# Altium PCB NL_CTL2.0.PcbDoc
Units mil, origin at the board's own origin, x right, y up, seen from the top; angles counter-clockwise.
Board outline 2839.68 x 2573.63 mil, 2 copper layers (Top Layer, Bottom Layer); 37 components, 40 nets, 140 pads, 131 vias.
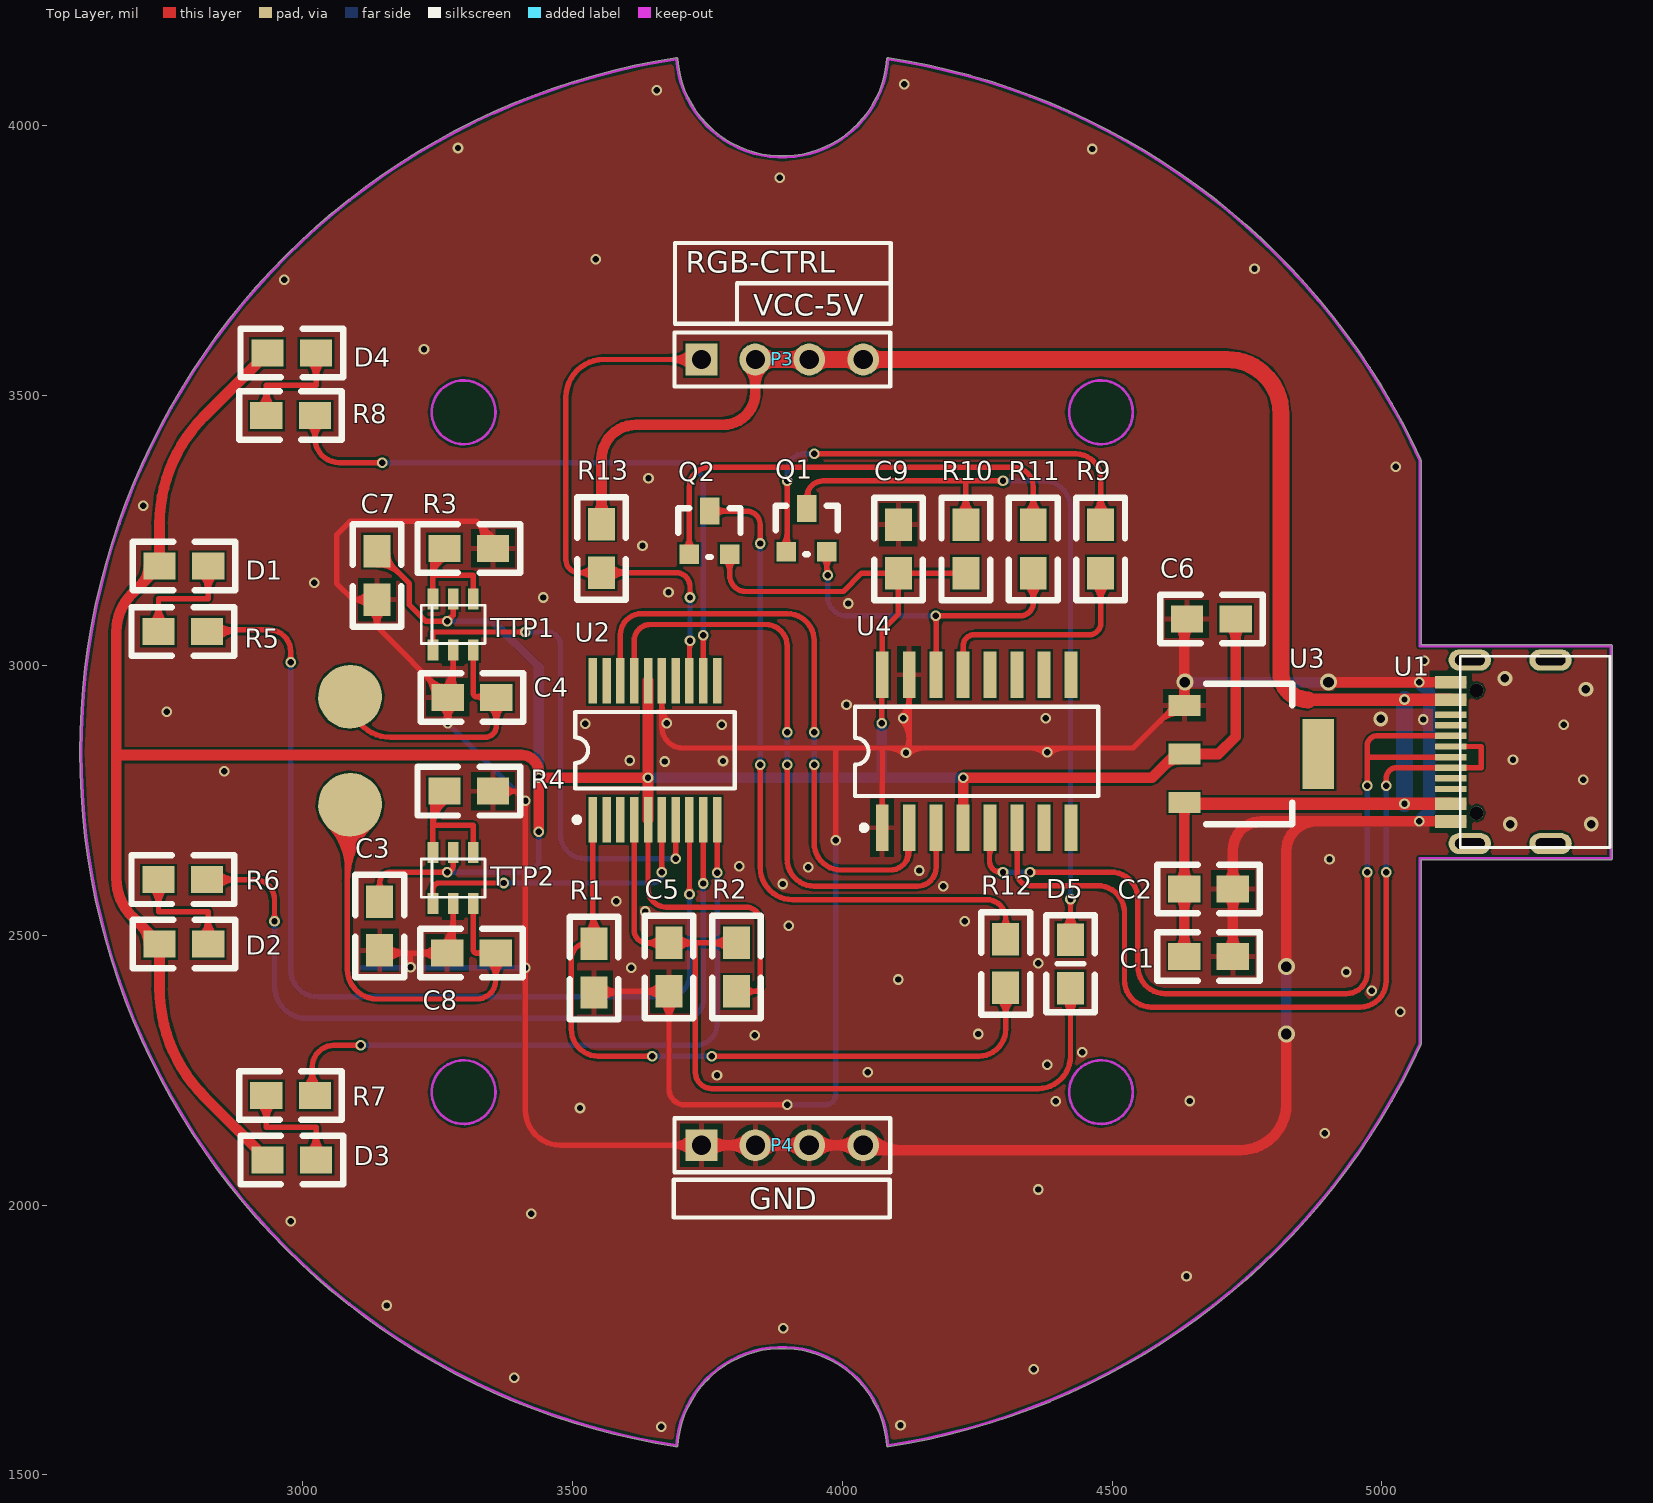
[diagram p0: Top Layer view]
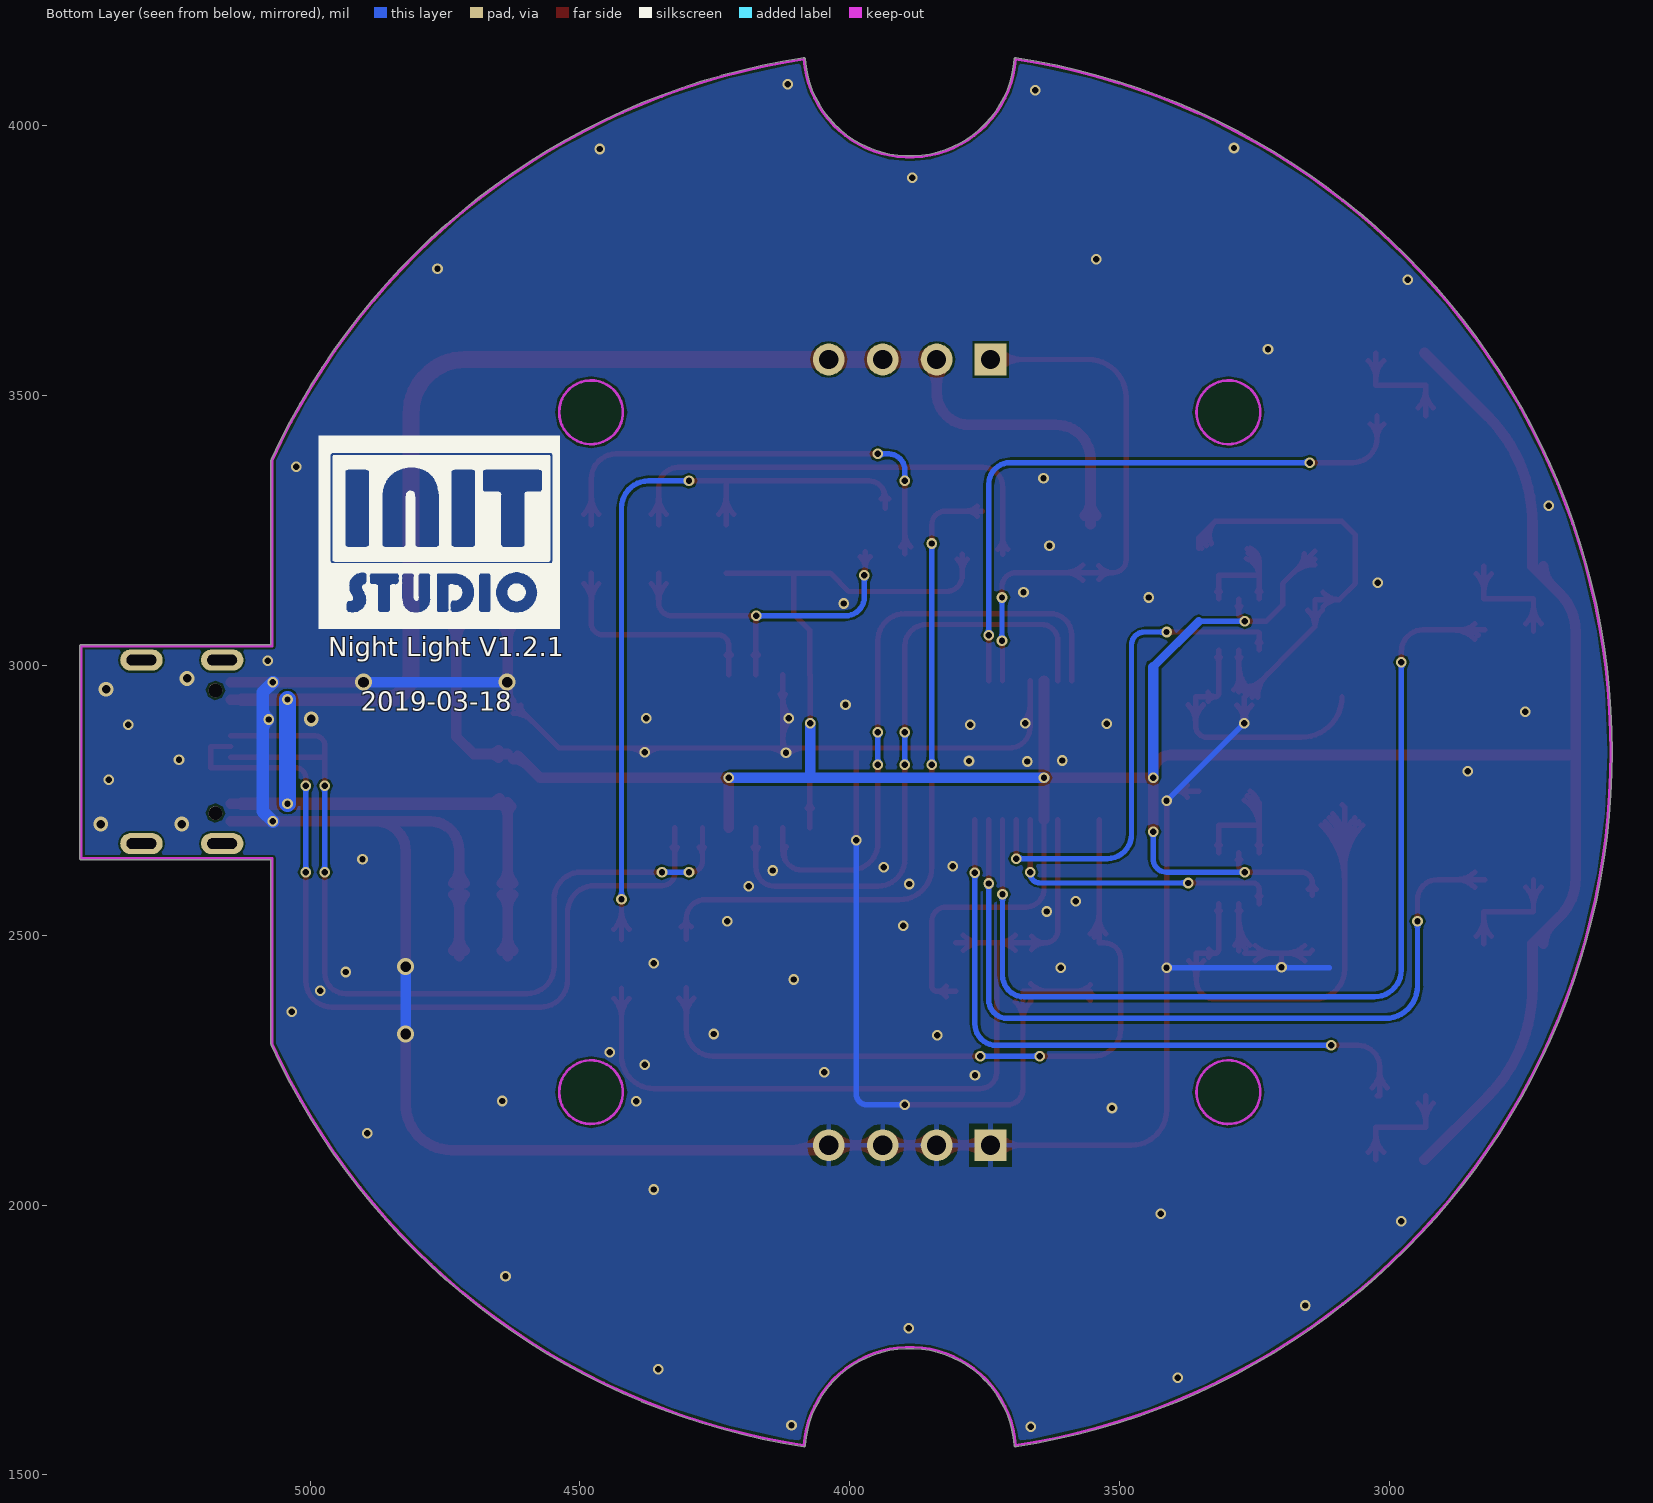
[diagram p1: Bottom Layer view, seen from below]

## Layer stack, top to bottom
Top Solder: solder mask 0.4, Solder Resist, Dk 3.5
Top Layer: signal copper 1.4
Dielectric1: dielectric 12.6, FR-4, Dk 4.8
Bottom Layer: signal copper 1.4
Bottom Solder: solder mask 0.4, Solder Resist, Dk 3.5

## Board outline
3695.13,1554.78 cw(c3888.91,1540.06) 3695.13,1554.8 cw(c3888.91,1540.06) 4082.68,1554.8 cw(c3888.91,1540.06) 4082.68,1554.78 4082.68,1554.8 ccw(c4085.19,1554.97) 4085.57,1552.48 ccw(c3888.91,2839.27) 5072.29,2296.97 ccw(c5070.01,2298.02) 5072.52,2298.02 5072.52,2639.91 5424.34,2639.91 ccw(c5424.34,2642.42) 5426.85,2642.42 ccw(c5424.34,2642.42) 5426.52,2643.68 5426.52,3034.86 ccw(c5424.34,3036.12) 5426.85,3036.12 ccw(c5424.34,3036.12) 5424.34,3038.64 5072.52,3038.64 5072.52,3380.52 ccw(c5070.01,3380.52) 5072.29,3381.57 ccw(c3888.91,2839.27) 4085.57,4126.06 ccw(c4085.19,4123.57) 4082.68,4123.74 ccw(c3888.91,4138.48) 4082.68,4123.76 4082.68,4123.74 cw(c3888.91,4138.48) 3695.13,4123.74 cw(c3888.91,4138.48) 3695.13,4123.76 3695.13,4123.74 ccw(c3692.62,4123.57) 3692.24,4126.06 ccw(c3888.91,2839.27) 3692.24,1552.48 ccw(c3692.62,1554.97)

## Design rules (kind name [scope] priority, off if disabled: settings)
Clearance [All] p1: gap=3.94
PolygonConnect PolygonConnect_1 [IsVia] p1: connectstyle=Direct reliefconductorwidth=10 reliefentries=4 polygonreliefangle="90 Angle" airgapwidth=10
PolygonConnect [All] p2: connectstyle=Relief reliefconductorwidth=10 reliefentries=4 polygonreliefangle="90 Angle" airgapwidth=10
RoutingVias [All] p1: holewidth=11.81 width=19.68 viastyle="Through Hole" minholewidth=11.81 minwidth=19.68 maxholewidth=11.81 maxwidth=19.68
SilkToSolderMaskClearance SilkscreenOverComponentPads [IsPad] p1: minsilkscreentomaskgap=10 clearancetoexposedcopper=TRUE
SolderMaskExpansion [All] p1: expansion=4
Width [All] p1: maxlimit=78.74 minlimit=10 preferedwidth=10
29 further rules are at their usual default settings.

## Components (designator, comment, footprint, x,y, rotation, side; value= is the part's Value field where it differs from the comment)
C1 "Cap" 0805 4724,2461 r180 top
C2 "Cap" 0805 4724,2586 r180 top
C3 "Cap" 0805 3143,2472 r90 top
C4 "Cap" 0805 3269,2941 r0 top
C5 "Cap" 0805 3679,2396 r90 top
C6 "Cap" 0805 4639,3086 r0 top
C7 "Cap" 0805 3138,3122 r90 top
C8 "Cap" 0805 3268,2467 r0 top
C9 "Cap" 0805 4104,3261 r270 top
D1 "LED0" 0805 2735,3184 r0 top
D2 "LED0" 0805 2735,2484 r0 top
D3 "LED0" 0805 2935,2084 r0 top
D4 "LED0" 0805 2935,3579 r0 top
D5 "DIODE" 0805L 4418,2402 r90 top
P3 "Header 4" HDR1X4 3739,3567 r0 top
P4 "Header 4" HDR1X4 3739,2111 r0 top
Q1 "8050" SOT23 3934,3251 r0 top
Q2 "8550" SOT23 3754,3246 r0 top
R1 "Res2" 0805 3540,2394 r90 top
R2 "Res2" 0805 3804,2486 r270 top
R3 "Res2" 0805 3353,3217 r180 top
R4 "Res2" 0805 3353,2767 r180 top
R5 "Res2" 0805 2733,3063 r0 top
R6 "Res2" 0805 2733,2603 r0 top
R7 "Res2" 0805 2933,2203 r0 top
R8 "Res2" 0805 2933,3463 r0 top
R9 "Res2" 0805 4479,3171 r90 top (schematic designator R13)
R10 "Res2" 0805 4229,3171 r90 top (schematic designator R14)
R11 "Res2" 0805 4354,3261 r270 top (schematic designator R15)
R12 "Res2" 0805 4303,2403 r90 top (schematic designator R16)
R13 "Res2" 0805 3554,3172 r90 top (schematic designator R17)
TTP1 "TTP" SOT23-6L 3279,3076 r90 top
TTP2 "TTP" SOT23-6L 3279,2606 r90 top
U1 "Type_C_16" Type_C16 5226,2840 r0 top
U2 "STM32f030F4P6" SSOP20 3644,2841 r90 top
U3 "AMS1117_3.3" SOT-223 4634,2926 r270 top
U4 "CH340C" SOP16 4249,2841 r0 top

## Footprints (in the part's own frame and the unit in brackets; to place one, negate y for a bottom-side part, rotate by r counter-clockwise, add the part's x,y. Pads: shape width x height; smd on the part's side, far side on the other; paste and mask are expansions set on the pad)
0805 [mil]
  rect 60x50 smd: 1(0,0) 2(90,0)
  silkscreen extent -50,-45 140,45
0805L [mil]
  rect 60x50 smd: 1(0,-5) 2(90,-5)
  silkscreen extent -45,-50 135,40
HDR1X4 [mm] "Connector; Header; 4 Position"
  rect 1.5x1.5 hole 0.9: 1(0,0)
  round 1.5 hole 0.9: 2(2.54,0) 3(5.08,0) 4(7.62,0)
  silkscreen extent -1.27,-1.27 8.89,1.27
SOP16 [mm] "Small Outline; 16 Leads; Body Wid"
  rect 0.6x2.2 smd: 1(-4.445,-3.6) 2(-3.175,-3.6) 3(-1.905,-3.6) 4(-0.635,-3.6) 5(0.635,-3.6) 6(1.905,-3.6) 7(3.175,-3.6) 8(4.445,-3.6) 9(4.445,3.6) 10(3.175,3.6) 11(1.905,3.6) 12(0.635,3.6) 13(-0.635,3.6) 14(-1.905,3.6) 15(-3.175,3.6) 16(-4.445,3.6)
  silkscreen extent -5.73,-3.72 5.73,2.1, body extent -5.1,-3.96 5.1,3.96, height 1.8
SOT23 [mil]
  rect 36x36 smd: B(-37.5,-40) E(37.5,-40)
  rect 36x50 smd: C(0.5,40)
  silkscreen extent -58,-45 58,45, body extent -58,-48 60,56, height 43
SOT23-6L [mm]
  rect 1x0.5 smd: 1(-1.2,0.95) 2(-1.2,0) 3(-1.2,-0.95) 4(1.2,-0.95) 5(1.2,0) 6(1.2,0.95)
  silkscreen extent -0.9,-1.5 0.9,1.5
SOT-223 [mil]
  rect 39x59 smd: 1(0,0) 3(180,0)
  rect 38.98x59.05 smd: 2(90,0)
  rect 129.13x59 smd: 4(90,248.03)
  silkscreen extent -40,40 220,200
SSOP20 [mm]
  rect 2.15x0.4 smd: 1(-3.224,2.696) 2(-3.224,2.046) 3(-3.224,1.396) 4(-3.224,0.746) 5(-3.224,0.096) 6(-3.224,-0.554) 7(-3.224,-1.204) 8(-3.224,-1.854) 9(-3.224,-2.504) 10(-3.224,-3.154) 11(3.326,-3.154) 12(3.326,-2.504) 13(3.326,-1.854) 14(3.326,-1.204) 15(3.326,-0.554) 16(3.326,0.096) 17(3.326,0.746) 18(3.326,1.396) 19(3.326,2.046) 20(3.326,2.696)
  silkscreen extent -3.35,-3.98 1.85,3.57
Type_C16 [mm]
  round 0.65 hole 0.65: 0(-1.28,2.89) 1(-1.28,-2.89)
  rect 1.5x0.6 smd: 1(-2.5,3.275) 2(-2.5,2.45) 11(-2.5,-2.45) 12(-2.5,-3.275)
  rect 1.5x0.3 smd: 3(-2.5,1.75) 4(-2.5,1.25) 5(-2.5,0.75) 6(-2.5,0.25) 7(-2.5,-0.25) 8(-2.5,-0.75) 9(-2.5,-1.25) 10(-2.5,-1.75)
  oval 2x1 hole 0.5 slot 1.4 at 0 deg: ""(-1.6,-4.32) ""(-1.6,4.32) ""(2.2,-4.32) ""(2.2,4.32)
  silkscreen extent -2.05,-4.5 5,4.5

## Part data
C1 C2 C3 C4 C5 C6 C7 C8 C9: "Capacitor"
D1 D2 D3 D4: "Typical INFRARED GaAs LED"
P3 P4: "Header, 4-Pin"
R1 R2 R3 R4 R5 R6 R7 R8 R9 R10 R11 R12 R13: "Resistor"
U1: library part T
U3: library part LM317, "3-Terminal Adjustable Positive Volta"

## Free pads (board coordinates)
  round 118.11 smd: 0(3088,2742) 1(3088,2942)

## Via types
v1: diameter 19.68, hole 11.81, Top Layer to Bottom Layer, 122 vias
v2: diameter 27.56, hole 15.75, Top Layer to Bottom Layer, 5 vias
v3: diameter 31.5, hole 19.68, Top Layer to Bottom Layer, 4 vias

## Nets (pads, with @x,y where several pads share a name; then routed paths per layer and width w, separated by ;. In a path a pad name is that pad's centre, name@x,y a point inside that pad or via, vN(x,y) a via of type N, cw(c..) or ccw(c..) an arc to the next point about the centre after c; other vN are vias at no path point)
5V: C1.2 C2.2 P3.2 P3.3 P3.4 R13.2 U1.2 U1.11 U3.3 | length 4026.1
  Top Layer w19.68: R13.2@3543.28,3277.72 ccw(c3517.41,3303.59) 3554,3303.59 ccw(c3590.59,3303.59) R13.2@3564.72,3277.72 ; R13.2 3554,3382 cw(c3618,3382) 3618,3446 3779,3446 ccw(c3779,3506) 3839,3506 P3.2 ; P3.2@3825.08,3553.08 cw(c3791.48,3519.48) 3839,3519.48 cw(c3886.52,3519.48) P3.2@3852.92,3553.08 ; C1.2@4623.28,2471.72 ccw(c4597.41,2497.59) 4634,2497.59 ccw(c4670.59,2497.59) C1.2@4644.72,2471.72 ; C2.2@4623.28,2575.28 cw(c4597.41,2549.41) 4634,2549.41 cw(c4670.59,2549.41) C2.2@4644.72,2575.28 ; C2.2@4623.28,2596.72 ccw(c4597.41,2622.59) 4634,2622.59 ccw(c4670.59,2622.59) C2.2@4644.72,2596.72 ; U3.3@4627.17,2739.17 cw(c4610.69,2722.68) 4634,2722.68 cw(c4657.32,2722.68) U3.3@4640.83,2739.17 ; C1.2 C2.2 U3.3 ; U1.11 U1.11@5147.26,2743.54 ; U1.2 U1.2@5147.26,2936.46
  Top Layer w23.62: U3.3@4634,2743.54 U1.11 ; U3.3@4649.44,2751.44 ccw(c4668.49,2770.49) 4668.49,2743.54 ; 4863,2936.46 U1.2
  Top Layer w31.5: P3.2 4713,3567 cw(c4713,3467) 4813,3467 4813,2986.46 ccw(c4863,2986.46) 4863,2936.46 ; P3.2@3848.74,3557.26 cw(c3872.27,3533.73) 3872.27,3567 cw(c3872.27,3600.27) P3.2@3848.74,3576.74 ; P3.3@3929.26,3557.26 ccw(c3905.73,3533.73) 3905.73,3567 ccw(c3905.73,3600.27) P3.3@3929.26,3576.74 ; P3.3@3948.74,3557.26 cw(c3972.27,3533.73) 3972.27,3567 cw(c3972.27,3600.27) P3.3@3948.74,3576.74 ; P3.4@4029.26,3557.26 ccw(c4005.73,3533.73) 4005.73,3567 ccw(c4005.73,3600.27) P3.4@4029.26,3576.74 ; P3.4@4048.74,3557.26 cw(c4072.27,3533.73) 4072.27,3567 cw(c4072.27,3600.27) P3.4@4048.74,3576.74
  Bottom Layer w31.5: v1(5042,2744) v1(5042,2937)
BOOT0: R1.2 R12.1 U2.1 | length 1604
  Top Layer w10: R1.2@3525.86,2503.14 ccw(c3496.93,2532.08) 3537.84,2532.08 ; 3537.84,2518.35 ccw(c3569.35,2518.35) R1.2@3547.07,2496.07 ; 3537.84,2542.49 ccw(c3593.49,2542.49) R1.2@3554.14,2503.14 ; U2.1 3537.84,2486 3528,2486 ccw(c3528,2456) 3498,2456 3498,2326 ccw(c3548,2326) 3548,2276 v1(3648,2276) ; v1@3644.58,2272.58 ccw(c3636.31,2264.31) 3636.31,2276 ccw(c3636.31,2287.69) v1@3644.58,2279.42 ; v1(3758,2276) 4253,2276 ccw(c4253,2326) 4303,2326 R12.1 ; v1@3761.42,2272.58 cw(c3769.69,2264.31) 3769.69,2276 cw(c3769.69,2287.69) v1@3761.42,2279.42 ; R12.1@4288.86,2383.86 cw(c4254.72,2349.72) 4303,2349.72 cw(c4351.28,2349.72) R12.1@4317.14,2383.86
  Bottom Layer w10: v1(3648,2276) v1(3758,2276) ; v1@3651.42,2272.58 cw(c3659.69,2264.31) 3659.69,2276 cw(c3659.69,2287.69) v1@3651.42,2279.42 ; v1@3754.58,2272.58 ccw(c3746.31,2264.31) 3746.31,2276 ccw(c3746.31,2287.69) v1@3754.58,2279.42
CH340_RX: U2.17 U4.3 | length 1289.5
  Top Layer w10: U2.17 3614.61,3046 cw(c3644.61,3046) 3644.61,3076 3858,3076 cw(c3858,3036) 3898,3036 v1(3898,2876) ; v1@3894.58,2812.58 cw(c3886.31,2804.31) 3898,2804.31 cw(c3909.69,2804.31) v1@3901.42,2812.58 ; v1@3894.58,2879.42 ccw(c3886.31,2887.69) 3898,2887.69 ccw(c3909.69,2887.69) v1@3901.42,2879.42 ; v1(3898,2816) 3898,2641 ccw(c3948,2641) 3948,2591 4139,2591 ccw(c4139,2626) 4174,2626 U4.3 ; U4.3@4169.18,2662.96 cw(c4157.56,2651.33) 4174,2651.33 cw(c4190.44,2651.33) U4.3@4178.82,2662.96
  Bottom Layer w10: v1@3894.58,2819.42 ccw(c3886.31,2827.69) 3898,2827.69 ccw(c3909.69,2827.69) v1@3901.42,2819.42 ; v1@3894.58,2872.58 cw(c3886.31,2864.31) 3898,2864.31 cw(c3909.69,2864.31) v1@3901.42,2872.58 ; v1(3898,2816) v1(3898,2876)
CH340_TX: U2.18 U4.2 | length 1232.2
  Top Layer w10: U2.18 3589.02,3057.02 cw(c3628,3057.02) 3628,3096 3898,3096 cw(c3898,3046) 3948,3046 v1(3948,2876) ; v1@3944.58,2812.58 cw(c3936.31,2804.31) 3948,2804.31 cw(c3959.69,2804.31) v1@3951.42,2812.58 ; v1@3944.58,2879.42 ccw(c3936.31,2887.69) 3948,2887.69 ccw(c3959.69,2887.69) v1@3951.42,2879.42 ; v1(3948,2816) 3948,2671 ccw(c3998,2671) 3998,2621 4089,2621 ccw(c4089,2656) 4124,2656 U4.2 ; U4.2@4118.1,2664.37 cw(c4094.85,2650.94) 4120.78,2644
  Bottom Layer w10: v1@3944.58,2819.42 ccw(c3936.31,2827.69) 3948,2827.69 ccw(c3959.69,2827.69) v1@3951.42,2819.42 ; v1@3944.58,2872.58 cw(c3936.31,2864.31) 3948,2864.31 cw(c3959.69,2864.31) v1@3951.42,2872.58 ; v1(3948,2816) v1(3948,2876)
GND: C1.1 C2.1 C3.1 C4.1 C5.1 C6.1 C7.1 C8.1 C9.1 P4.1 P4.2 P4.3 P4.4 R1.1 R3.1 R4.1 TTP1.2 TTP2.2 U1.1@5127.57,2968.94 U1.12 U2.15 U3.1 U4.1 U4.15 | length 11559.9
  Top Layer w10: C7.1@3123.15,3108.6 ccw(c3093,3081.38) 3093,3122 ; C7.1@3123.15,3135.4 cw(c3093,3162.62) 3093,3122 ; C7.1@3124.6,3102.15 cw(c3097.38,3072) 3138,3072 ; C3.1 3148,2467 3200,2467 ; C7.1@3151.4,3102.15 ccw(c3178.62,3072) 3138,3072 ; C3.1@3157.14,2452.86 cw(c3191.28,2418.72) 3191.28,2467 cw(c3191.28,2515.28) C3.1@3157.14,2481.14 ; v1@3196.58,2444.42 ccw(c3188.31,2452.69) 3200,2452.69 ccw(c3211.69,2452.69) v1@3203.42,2444.42 ; v1(3200,2441) 3200,2467 ; 3226.32,2983.68 cw(c3183.64,2941) C4.1@3244,2941 ; 3238.39,2971.61 ccw(c3264,2997.21) C4.1@3264,2961 ; 3243.39,2966.61 cw(c3217.79,2941) C4.1@3254,2941 ; C8.1@3248.86,2452.86 ccw(c3214.72,2418.72) 3214.72,2467 ccw(c3214.72,2515.28) C8.1@3248.86,2481.14 ; C4.1@3254.92,2926.8 cw(c3221.41,2893) v1(3269,2893) ; C8.1@3258.86,2481.14 ccw(c3210.23,2529.77) 3279,2529.77 ; C4.1@3259.86,2955.14 ccw(c3213.64,3001.36) 3279,3001.36 ; v1@3264.81,2895.42 ccw(c3254.68,2901.27) 3265.97,2904.29 ; v1@3265.58,2896.42 ccw(c3257.31,2904.69) 3269,2904.69 ccw(c3280.69,2904.69) v1@3272.42,2896.42 ; C8.1@3265.93,2474.07 ccw(c3234.37,2505.63) 3279,2505.63 ; 3265.98,2904.29 ccw(c3277.27,2907.32) v1@3271.42,2897.19 ; v1@3266.58,2897.19 ccw(c3260.73,2907.32) 3272.02,2904.29 ; C4.1@3266.93,2948.07 ccw(c3237.79,2977.21) 3279,2977.21 ccw(c3310.21,2977.21) C4.1@3288.14,2955.14 ; C8.1 3200,2467 ; 3272.03,2904.29 ccw(c3283.32,2901.27) v1@3273.19,2895.42 ; TTP2.2@3275.58,2545.49 cw(c3267.31,2537.22) 3279,2537.22 cw(c3290.69,2537.22) TTP2.2@3282.42,2545.49 ; TTP1.2@3275.58,3015.49 cw(c3267.31,3007.22) 3279,3007.22 cw(c3290.69,3007.22) TTP1.2@3282.42,3015.49 ; C8.1@3279,2471 TTP2.2 ; 3279,2500.8 ccw(c3306.8,2500.8) C8.1@3287.14,2481.14 ; C4.1@3279,2951 TTP1.2 ; C4.1@3283.08,2926.8 ccw(c3316.59,2893) v1(3269,2893) ; R3.1@3329.99,3225.7 ccw(c3297.43,3241.43) 3323,3267 ; 3332.95,3257.05 cw(c3310.85,3234.95) R3.1@3339,3221.35 ; 3342.91,3247.09 cw(c3324.27,3228.46) R3.1@3348,3217 ; R4.1 3395,2767 ; R3.1 3353,3237 3323,3267 ; R4.1@3374.73,2756.05 cw(c3395,2742.78) 3395,2767 ; R4.1@3374.73,2777.95 ccw(c3395,2791.22) 3395,2767 ; v1@3408.16,2749 ccw(c3396.47,2749) 3404.73,2757.27 ccw(c3413,2765.53) v1@3413,2753.84 ; v1@3409.58,2436.58 cw(c3401.31,2428.31) 3413,2428.31 cw(c3424.69,2428.31) v1@3416.42,2436.58 ; v1@3409.58,2443.42 ccw(c3401.31,2451.69) 3413,2451.69 ccw(c3424.69,2451.69) v1@3416.42,2443.42 ; v1@3409.58,2745.58 cw(c3401.31,2737.31) 3413,2737.31 cw(c3424.69,2737.31) v1@3416.42,2745.58 ; R1.1@3547.07,2386.93 cw(c3568.97,2365.03) 3568.97,2396 ; R1.1@3554,2396 C5.1 3679,2215 ccw(c3708,2215) 3708,2186 v1(3898,2186) ; R1.1@3554.14,2379.86 cw(c3593.11,2340.89) 3593.11,2396 ; R1.1@3554.14,2408.14 ccw(c3583.46,2437.46) 3583.46,2396 ; C5.1@3664.86,2376.86 cw(c3630.72,2342.72) 3679,2342.72 cw(c3727.28,2342.72) C5.1@3693.14,2376.86 ; C5.1@3664.86,2381.86 ccw(c3630.72,2347.72) 3630.72,2396 ccw(c3630.72,2444.28) C5.1@3664.86,2410.14 ; 3665.8,2902.77 ccw(c3684.77,2902.77) v1@3671.35,2889.35 ; 3665.8,2926.91 ccw(c3708.91,2926.91) v1@3678.42,2896.42 ; U2.15 3665.8,2886 ccw(c3704.8,2886) 3704.8,2847 3988,2847 ; P4.1@3721.66,2093.66 ccw(c3679.79,2051.79) 3679.79,2111 ccw(c3679.79,2170.21) P4.1@3721.66,2128.34 ; P4.1@3728.73,2100.73 ccw(c3703.93,2075.93) 3703.93,2111 ccw(c3703.93,2146.07) P4.1@3728.73,2121.27 ; P4.1@3739,2097 ccw(c3739,2111) P4.1@3753,2111 ; P4.1 3478,2111 cw(c3478,2176) 3413,2176 v1(3413,2440) v1(3413,2749) 3395,2767 ; v1@3894.58,2182.58 ccw(c3886.31,2174.31) 3886.31,2186 ccw(c3886.31,2197.69) v1@3894.58,2189.42 ; v1@3984.58,2679.42 ccw(c3976.31,2687.69) 3988,2687.69 ccw(c3999.69,2687.69) v1@3991.42,2679.42 ; v1(3988,2676) 3988,2847 ; U4.1@4069.18,2735.58 ccw(c4057.56,2747.21) 4074,2747.21 ccw(c4090.44,2747.21) U4.1@4078.82,2735.58 ; U4.1 4074,2844.13 4076.87,2847 4539,2847 4618,2926 U3.1 ; 4074,2847 3988,2847 ; 4084.78,2847 cw(c4084.78,2804.58) v1@4114.77,2834.58 ; 4108.92,2847 cw(c4108.92,2828.72) v1@4121.84,2841.65 ; v1@4109.58,2898.58 cw(c4074.75,2863.75) 4124,2863.75 ; v1@4109.58,2905.42 ccw(c4074.75,2940.25) U4.15@4124,2940.25 ; v1@4114.55,2841.65 cw(c4127.47,2828.72) 4127.47,2847 ; v1@4114.77,2841.42 ccw(c4092.5,2863.7) 4124,2863.7 ; v1@4116.65,2898.35 ccw(c4098.9,2916.11) 4124,2916.11 ; v1@4116.65,2905.65 cw(c4098.9,2887.89) 4124,2887.89 ; U4.15@4119.18,2946.42 cw(c4107.56,2934.79) 4124,2934.79 cw(c4140.44,2934.79) U4.15@4128.82,2946.42 ; v1@4121.62,2834.58 cw(c4151.62,2804.58) 4151.62,2847 ; 4124,2848 U4.15 ; 4349,2847 cw(c4349,2808) v1@4376.58,2835.58 ; 4373.14,2847 cw(c4373.14,2832.14) v1@4383.65,2842.65 ; v1@4376.35,2842.65 cw(c4386.86,2832.14) 4386.86,2847 ; v1@4383.42,2835.58 cw(c4411,2808) 4411,2847 ; 4589,2897 cw(c4624,2862.01) U3.1@4624,2911.5 ; 4603.49,2911.49 ccw(c4588.98,2926) U3.1@4609.5,2926 ; U3.1@4606.08,2914.08 cw(c4624,2896.15) U3.1@4624,2921.5 ; 3093,3122 3063,3152 3063,3242 3088,3267 3323,3267 ; 3093,3122 C7.1 3138,3072 ; 3138,3072 C4.1 v1(3269,2893)
  Top Layer w19.68: P4.1@3739,2097 P4.1 3753,2111 P4.2 P4.4 4048,2102 4738,2102 ccw(c4738,2187) 4823,2187 v3(4823,2317) ; P4.1@3752.92,2097.08 cw(c3786.52,2063.48) 3786.52,2111 cw(c3786.52,2158.52) P4.1@3752.92,2124.92 ; P4.2@3825.08,2097.08 ccw(c3791.48,2063.48) 3791.48,2111 ccw(c3791.48,2158.52) P4.2@3825.08,2124.92 ; P4.2@3852.92,2097.08 cw(c3886.52,2063.48) 3886.52,2111 cw(c3886.52,2158.52) P4.2@3852.92,2124.92 ; P4.3@3925.08,2097.08 ccw(c3891.48,2063.48) 3891.48,2111 ccw(c3891.48,2158.52) P4.3@3925.08,2124.92 ; P4.3@3952.92,2097.08 cw(c3986.52,2063.48) 3986.52,2111 cw(c3986.52,2158.52) P4.3@3952.92,2124.92 ; P4.4@4025.08,2097.08 ccw(c3991.48,2063.48) 3991.48,2111 ccw(c3991.48,2158.52) P4.4@4025.08,2124.92 ; P4.4@4052.92,2124.92 ccw(c4108.25,2180.25) 4108.25,2102 ; C6.1@4623.28,3075.28 cw(c4597.41,3049.41) 4634,3049.41 cw(c4670.59,3049.41) C6.1@4644.72,3075.28 ; U3.1@4627.17,2932.83 ccw(c4610.68,2949.32) 4634,2949.32 ccw(c4657.32,2949.32) U3.1@4640.83,2932.83 ; U3.1 C6.1@4634,3086 ; 4634,2952.42 cw(c4651.46,2952.42) v3@4639.11,2964.76 ; 4634,2985.46 ccw(c4651.46,2985.46) v3@4639.11,2973.11 ; C1.1@4713.28,2471.72 ccw(c4687.41,2497.59) 4724,2497.59 ccw(c4760.59,2497.59) C1.1@4734.72,2471.72 ; C2.1@4713.28,2575.28 cw(c4687.41,2549.41) 4724,2549.41 cw(c4760.59,2549.41) C2.1@4734.72,2575.28 ; C2.1@4713.28,2596.72 ccw(c4687.41,2622.59) 4724,2622.59 ccw(c4760.59,2622.59) C2.1@4734.72,2596.72 ; C1.1 C2.1 4724,2658 cw(c4777.06,2658) 4777.06,2711.06 4878,2711.06 ; v3(4823,2442) 4823,2656.06 cw(c4878,2656.06) 4878,2711.06 ; v3(4901.06,2968.94) v1(5069,2968.94) 5127.57,2968.94 U1.1@5147.26,2968.94 ; U1.12@5147.26,2711.06 U1.12 4878,2711.06
  Bottom Layer w10: 3111,2440 v1(3413,2440) ; 3185.89,2440 ccw(c3185.89,2455.11) v1@3196.58,2444.42 ; v1@3203.42,2444.42 ccw(c3214.11,2455.11) 3214.11,2440 ; v1@3268,2892 ccw(c3268,2893) v1(3269,2893) v1(3413,2749) ; v1@3269,2888.16 cw(c3269,2876.47) 3277.27,2884.73 cw(c3285.53,2893) v1@3273.84,2893 ; v1@3408.16,2749 ccw(c3396.47,2749) 3404.73,2757.27 ccw(c3413,2765.53) v1@3413,2753.84 ; v1@3409.58,2436.58 ccw(c3401.31,2428.31) 3401.31,2440 ccw(c3401.31,2451.69) v1@3409.58,2443.42 ; v1(3898,2186) 3968,2186 ccw(c3968,2206) 3988,2206 v1(3988,2676) ; v1@3901.42,2182.58 cw(c3909.69,2174.31) 3909.69,2186 cw(c3909.69,2197.69) v1@3901.42,2189.42 ; v1@3984.58,2672.58 cw(c3976.31,2664.31) 3988,2664.31 cw(c3999.69,2664.31) v1@3991.42,2672.58
  Bottom Layer w19.68: v3(4634.94,2968.94) v3(4901.06,2968.94) ; v3(4823,2317) v3(4823,2442) ; v1@5068,2967.94 v1(5069,2968.94)
  Bottom Layer w23.62: v1(5069,2711) 5088,2730 5088,2949.94 v1(5069,2968.94) ; v1@5078.39,2898.61 ccw(c5055.2,2921.8) 5088,2921.8 ; v1@5078.39,2901.39 cw(c5055.2,2878.2) 5088,2878.2
  other v1: 3665,1589 4108,1592 3392,1680 4355,1696.1 3891,1772 3156,1814 4638,1868 2978,1970 3424,1984 4363,2029 4894,2133 3514,2180 4396,2192.5 4644,2193 3768,2241 4047,2246 4380,2260 4445,2283 3838,2315 4252,2317 5034,2358 4981,2397 4104,2418 4934,2432 3609,2440 4363,2447.96 3901,2517.8 4227,2526 3635,2544 3581,2563 4187,2591 3890,2595 4143,2620 3937,2626 3809,2628 4903,2641 5373,2788 2855,2804 3671,2822 3779,2823 3606,2824 5243,2825 4118.2,2838 4380,2839 3777,2890 5337,2890 3524,2892 3675,2893 5077,2900 4113,2902 4377,2902 2748,2914 4008,2927 5078.57,3009 4011,3114.9 3446,3126 3678,3136 3022,3153 3630,3222 2705,3296 3641,3347 5026,3368 3225,3586 2966,3715 4764,3735 3543,3752.61 3884,3904 4463,3957 3288,3959 3656,4066 4115,4077
  other v2: 5238,2706 5388,2706 4998,2901 5378,2956 5228,2976
KEY1_PAD: C4.2 pad.1 TTP1.3 | length 632.3
  Top Layer w10: pad.1 ccw(c3163,2942) 3163,2867 3338,2867 ccw(c3338,2888) 3359,2888 C4.2 ccw(c3358,2941) 3358,2942 3323,2942 ; TTP1.3@3312.98,3015.49 cw(c3304.71,3007.22) 3316.4,3007.22 cw(c3328.09,3007.22) TTP1.3@3319.83,3015.49 ; TTP1.3 3316.4,2948.6 ccw(c3323,2948.6) 3323,2942 ; C4.2@3335.43,2933.58 ccw(c3323,2928.62) 3323,2942 ; C4.2@3336.18,2950.08 cw(c3323,2956.79) 3323,2942 ; C4.2@3344.86,2926.86 cw(c3310.72,2892.72) 3359,2892.72 cw(c3407.28,2892.72) C4.2@3373.14,2926.86
KEY2_PAD: C8.2 pad.0 TTP2.3 | length 1497.8
  Top Layer w10: pad.0@3049.78,2703.78 cw(c2969.57,2623.57) 3083,2623.57 cw(c3206.43,2623.57) pad.0@3119.15,2710.85 ; pad.0@3056.85,2710.85 cw(c2993.71,2647.71) 3083,2647.71 cw(c3182.29,2647.71) pad.0@3112.08,2717.92 ; pad.0@3063.92,2717.92 cw(c3017.85,2671.85) 3083,2671.85 cw(c3158.15,2671.85) pad.0@3105.01,2724.99 ; 3083,2599.43 cw(c3230.57,2599.43) pad.0@3126.22,2703.78 ; pad.0 3083,2737 3083,2437 ccw(c3138,2437) 3138,2382 3323,2382 ccw(c3323,2417) 3358,2417 C8.2 3323,2467 ; TTP2.3@3312.98,2545.49 cw(c3304.71,2537.22) 3316.4,2537.22 cw(c3328.09,2537.22) TTP2.3@3319.83,2545.49 ; TTP2.3 3316.4,2473.6 ccw(c3323,2473.6) 3323,2467 ; C8.2@3334.54,2459.31 ccw(c3323,2454.5) 3323,2467 ; C8.2@3334.54,2474.69 cw(c3323,2479.5) 3323,2467 ; C8.2@3343.86,2452.86 cw(c3309.72,2418.72) 3358,2418.72 cw(c3406.28,2418.72) C8.2@3372.14,2452.86
LED1: R5.2 U2.8 | length 2022.5
  Top Layer w10: R5.2@2823,3066 2938,3066 cw(c2938,3026) 2978,3026 v1(2978,3006) ; R5.2@2835.07,3055.93 cw(c2859.39,3031.61) 2859.39,3066 ; R5.2@2842.14,3048.86 cw(c2883.53,3007.47) 2883.53,3066 ; R5.2@2842.14,3077.14 ccw(c2869.04,3104.04) 2869.04,3066 ; v1@2974.58,3009.42 ccw(c2966.31,3017.69) 2978,3017.69 ccw(c2989.69,3017.69) v1@2981.42,3009.42 ; v1@3713.55,2579.42 ccw(c3705.29,2587.69) 3716.98,2587.69 ccw(c3728.67,2587.69) v1@3720.4,2579.42 ; v1(3716.98,2576) U2.8
  Bottom Layer w10: v1@2974.58,3002.58 cw(c2966.31,2994.31) 2978,2994.31 cw(c2989.69,2994.31) v1@2981.42,3002.58 ; v1(2978,3006) 2978,2436 ccw(c3028,2436) 3028,2386 3676.98,2386 ccw(c3676.98,2426) 3716.98,2426 v1(3716.98,2576) ; v1@3713.55,2572.58 cw(c3705.29,2564.31) 3716.98,2564.31 cw(c3728.67,2564.31) v1@3720.4,2572.58
LED2: R6.2 U2.9 | length 1637.5
  Top Layer w10: R6.2 2911,2603 cw(c2911,2566) 2948,2566 v1(2948,2526) ; R6.2@2842.14,2588.86 cw(c2876.28,2554.72) 2876.28,2603 cw(c2876.28,2651.28) R6.2@2842.14,2617.14 ; v1@2944.58,2529.42 ccw(c2936.31,2537.69) 2948,2537.69 ccw(c2959.69,2537.69) v1@2951.42,2529.42 ; v1@3739.14,2599.42 ccw(c3730.88,2607.69) 3742.57,2607.69 ccw(c3754.26,2607.69) v1@3745.99,2599.42 ; v1(3742.57,2596) U2.9
  Bottom Layer w10: v1@2944.58,2522.58 cw(c2936.31,2514.31) 2948,2514.31 cw(c2959.69,2514.31) v1@2951.42,2522.58 ; v1(2948,2526) 2948,2406 ccw(c3008,2406) 3008,2346 3708,2346 ccw(c3708,2380.57) 3742.57,2380.57 v1(3742.57,2596) ; v1@3739.14,2592.58 cw(c3730.88,2584.31) 3742.57,2584.31 cw(c3754.26,2584.31) v1@3745.99,2592.58
LED3: R7.2 U2.10 | length 1381.2
  Top Layer w10: R7.2@3003.86,2217.14 ccw(c2969.72,2251.28) 3018,2251.28 ccw(c3066.28,2251.28) R7.2@3032.14,2217.14 ; R7.2 3018,2203 3018,2256 cw(c3058,2256) 3058,2296 v1(3108,2296) ; v1@3104.58,2292.58 ccw(c3096.31,2284.31) 3096.31,2296 ccw(c3096.31,2307.69) v1@3104.58,2299.42 ; v1@3764.73,2619.42 ccw(c3756.47,2627.69) 3768.16,2627.69 ccw(c3779.85,2627.69) v1@3771.58,2619.42 ; v1(3768.16,2616) U2.10
  Bottom Layer w10: v1(3108,2296) 3728.16,2296 ccw(c3728.16,2336) 3768.16,2336 v1(3768.16,2616) ; v1@3111.42,2292.58 cw(c3119.69,2284.31) 3119.69,2296 cw(c3119.69,2307.69) v1@3111.42,2299.42 ; v1@3764.73,2612.58 cw(c3756.47,2604.31) 3768.16,2604.31 cw(c3779.85,2604.31) v1@3771.58,2612.58
LED4: R8.2 U2.12 | length 1308.2
  Top Layer w10: R8.2@3010.39,3447.47 cw(c2988.9,3421) 3023,3421 ; R8.2 3023,3421 ; R8.2@3035.61,3447.47 ccw(c3057.1,3421) 3023,3421 ; v1@3144.58,3372.58 ccw(c3136.31,3364.31) 3136.31,3376 ccw(c3136.31,3387.69) v1@3144.58,3379.42 ; v1(3148,3376) 3068,3376 cw(c3068,3421) 3023,3421 ; v1@3739.14,3052.58 cw(c3730.88,3044.31) 3742.57,3044.31 cw(c3754.26,3044.31) v1@3745.99,3052.58 ; U2.12 v1(3742.57,3056)
  Bottom Layer w10: v1(3148,3376) 3702.57,3376 cw(c3702.57,3336) 3742.57,3336 v1(3742.57,3056) ; v1@3151.42,3372.58 cw(c3159.69,3364.31) 3159.69,3376 cw(c3159.69,3387.69) v1@3151.42,3379.42 ; v1@3739.14,3059.42 ccw(c3730.88,3067.69) 3742.57,3067.69 ccw(c3754.26,3067.69) v1@3745.99,3059.42
MCU_RTS: C5.2 D5.1 R2.1 U2.4 | length 1806.5
  Top Layer w10: U2.4 3614.61,2509.02 ccw(c3637.63,2509.02) 3637.63,2486 ; C5.2@3663.33,2473.58 ccw(c3637.63,2453.22) 3637.63,2486 ; C5.2@3663.33,2498.42 cw(c3637.63,2518.78) 3637.63,2486 ; C5.2@3693.14,2471.86 cw(c3727.28,2437.72) 3727.28,2486 cw(c3727.28,2534.28) C5.2@3693.14,2500.14 ; R2.1@3789.86,2471.86 ccw(c3755.72,2437.72) 3755.72,2486 ccw(c3755.72,2534.28) R2.1@3789.86,2500.14 ; R2.1 3728,2486 ; D5.1@4408.86,2382.86 cw(c4374.72,2348.72) 4423,2348.72 cw(c4471.28,2348.72) D5.1@4437.14,2382.86 ; D5.1 4423,2276 cw(c4363,2276) 4363,2216 3758,2216 cw(c3758,2246) 3728,2246 3728,2486 ; 3637.63,2486 C5.2 3728,2486
NetD1_1: 
NetD1_2: D1.2 R5.1 | length 364.7
  Top Layer w10: R5.1@2718.86,3077.14 ccw(c2684.72,3111.28) 2733,3111.28 ccw(c2781.28,3111.28) R5.1@2747.14,3077.14 ; R5.1 2733,3124 2825,3124 D1.2 ; D1.2@2810.86,3169.86 cw(c2776.72,3135.72) 2825,3135.72 cw(c2873.28,3135.72) D1.2@2839.14,3169.86
NetD2_1: 
NetD2_2: D2.2 R6.1 | length 362.7
  Top Layer w10: R6.1@2718.86,2588.86 cw(c2684.72,2554.72) 2733,2554.72 cw(c2781.28,2554.72) R6.1@2747.14,2588.86 ; R6.1 2733,2544 2825,2544 D2.2 ; D2.2@2810.86,2498.14 ccw(c2776.72,2532.28) 2825,2532.28 ccw(c2873.28,2532.28) D2.2@2839.14,2498.14
NetD3_1: 
NetD3_2: D3.2 R7.1 | length 362.7
  Top Layer w10: R7.1@2918.86,2188.86 cw(c2884.72,2154.72) 2933,2154.72 cw(c2981.28,2154.72) R7.1@2947.14,2188.86 ; R7.1 2933,2144 3025,2144 D3.2 ; D3.2@3010.86,2098.14 ccw(c2976.72,2132.28) 3025,2132.28 ccw(c3073.28,2132.28) D3.2@3039.14,2098.14
NetD4_1: 
NetD4_2: D4.2 R8.1 | length 359.7
  Top Layer w10: R8.1@2918.86,3477.14 ccw(c2884.72,3511.28) 2933,3511.28 ccw(c2981.28,3511.28) R8.1@2947.14,3477.14 ; R8.1 2933,3519 3025,3519 D4.2 ; D4.2@3010.86,3564.86 cw(c2976.72,3530.72) 3025,3530.72 cw(c3073.28,3530.72) D4.2@3039.14,3564.86
NetD5_2: D5.2 Q1.C R10.2 | length 1690
  Top Layer w10: Q1.C@3928,3309.26 ccw(c3918.49,3325.72) 3936.86,3320.8 ; Q1.C 3934.5,3312 cw(c3964.5,3312) 3964.5,3342 4229,3342 ; 3936.89,3320.94 ccw(c3947.44,3318.11) Q1.C@3941.53,3308.93 ; R10.2@4214.86,3280.14 ccw(c4180.72,3314.28) 4229,3314.28 ccw(c4277.28,3314.28) R10.2@4243.14,3280.14 ; R10.2 4229,3342 ; v1@4294.58,3338.58 ccw(c4286.31,3330.31) 4286.31,3342 ccw(c4286.31,3353.69) v1@4294.58,3345.42 ; v1(4298,3342) 4229,3342 ; D5.2@4408.86,2511.14 ccw(c4374.72,2545.28) 4423,2545.28 ccw(c4471.28,2545.28) D5.2@4437.14,2511.14 ; v1@4419.58,2563.58 cw(c4411.31,2555.31) 4423,2555.31 cw(c4434.69,2555.31) v1@4426.42,2563.58 ; D5.2 v1(4423,2567)
  Bottom Layer w10: v1(4298,3342) 4373,3342 cw(c4373,3292) 4423,3292 v1(4423,2567) ; v1@4301.42,3338.58 cw(c4309.69,3330.31) 4309.69,3342 cw(c4309.69,3353.69) v1@4301.42,3345.42 ; v1@4419.58,2570.42 ccw(c4411.31,2578.69) 4423,2578.69 ccw(c4434.69,2578.69) v1@4426.42,2570.42
NetD7_2: 
NetQ1_B: Q1.B R9.2 | length 1063
  Top Layer w10: Q1.B@3887.31,3220.19 ccw(c3861.49,3246.01) 3898,3246.01 ; v1@3894.58,3338.58 cw(c3886.31,3330.31) 3898,3330.31 cw(c3909.69,3330.31) v1@3901.42,3338.58 ; Q1.B@3898,3207 v1(3898,3342) ; 3898,3238.76 ccw(c3924.26,3238.76) Q1.B@3905.69,3220.19 ; v1(3948,3392) 4433,3392 cw(c4433,3346) 4479,3346 R9.2 ; v1@3951.42,3388.58 cw(c3959.69,3380.31) 3959.69,3392 cw(c3959.69,3403.69) v1@3951.42,3395.42 ; R9.2@4464.86,3280.14 ccw(c4430.72,3314.28) 4479,3314.28 ccw(c4527.28,3314.28) R9.2@4493.14,3280.14
  Bottom Layer w10: v1@3894.58,3345.42 ccw(c3886.31,3353.69) 3898,3353.69 ccw(c3909.69,3353.69) v1@3901.42,3345.42 ; v1(3898,3342) 3898,3362 cw(c3928,3362) 3928,3392 v1(3948,3392) ; v1@3944.58,3388.58 ccw(c3936.31,3380.31) 3936.31,3392 ccw(c3936.31,3403.69) v1@3944.58,3395.42
NetQ1_e: Q1.E R11.2 U4.14 | length 894.6
  Top Layer w10: Q1.E@3962.31,3201.81 cw(c3940.12,3179.62) 3971.5,3179.62 cw(c4002.88,3179.62) Q1.E@3980.69,3201.81 ; 3971.5,3182.31 ccw(c3988.31,3182.31) v1@3976.42,3170.42 ; Q1.E 3971.5,3167 v1(3973,3167) ; U4.14@4169.18,3019.04 ccw(c4157.56,3030.67) 4174,3030.67 ccw(c4190.44,3030.67) U4.14@4178.82,3019.04 ; v1@4169.58,3088.58 cw(c4158.9,3077.89) 4174,3077.89 ; U4.14 4174,3092 4330,3092 ccw(c4330,3116) 4354,3116 R11.2 ; v1@4176.42,3088.58 cw(c4184.69,3080.31) 4184.69,3092 cw(c4184.69,3103.69) v1@4176.42,3095.42 ; R11.2@4339.86,3151.86 cw(c4305.72,3117.72) 4354,3117.72 cw(c4402.28,3117.72) R11.2@4368.14,3151.86
  Bottom Layer w10: v1@3969.58,3163.58 cw(c3961.31,3155.31) 3973,3155.31 cw(c3984.69,3155.31) v1@3976.42,3163.58 ; v1(3973,3167) 3973,3127 ccw(c4008,3127) 4008,3092 v1(4173,3092) ; v1@4169.58,3088.58 ccw(c4161.31,3080.31) 4161.31,3092 ccw(c4161.31,3103.69) v1@4169.58,3095.42
NetQ2_B: Q2.B R11.1 | length 998.5
  Top Layer w10: Q2.B@3707.31,3215.19 ccw(c3685.12,3237.38) 3716.5,3237.38 ccw(c3747.89,3237.38) Q2.B@3725.69,3215.19 ; Q2.B 3716.5,3330.5 cw(c3753,3330.5) 3753,3367 4318,3367 cw(c4318,3331) 4354,3331 R11.1 ; R11.1@4339.86,3280.14 ccw(c4305.72,3314.28) 4354,3314.28 ccw(c4402.28,3314.28) R11.1@4368.14,3280.14
NetQ2_C: Q2.C R12.2 | length 1450.3
  Top Layer w10: Q2.C 3823,3286 cw(c3823,3261) 3848,3261 v1(3848,3226) ; Q2.C@3763.69,3276.81 cw(c3785.89,3254.62) 3785.89,3286 cw(c3785.89,3317.38) Q2.C@3763.69,3295.19 ; v1@3844.58,2812.58 cw(c3836.31,2804.31) 3848,2804.31 cw(c3859.69,2804.31) v1@3851.42,2812.58 ; v1@3844.58,3229.42 ccw(c3836.31,3237.69) 3848,3237.69 ccw(c3859.69,3237.69) v1@3851.42,3229.42 ; v1(3848,2816) 3848,2626 ccw(c3908,2626) 3908,2566 4268,2566 cw(c4268,2531) 4303,2531 ; R12.2@4293.75,2515.73 ccw(c4285.78,2531) 4303,2531 ; R12.2 4303,2531 ; R12.2@4312.25,2515.73 cw(c4320.22,2531) 4303,2531
  Bottom Layer w10: v1@3844.58,2819.42 ccw(c3836.31,2827.69) 3848,2827.69 ccw(c3859.69,2827.69) v1@3851.42,2819.42 ; v1@3844.58,3222.58 cw(c3836.31,3214.31) 3848,3214.31 cw(c3859.69,3214.31) v1@3851.42,3222.58 ; v1(3848,2816) v1(3848,3226)
NetR3_2: R3.2 TTP1.4 TTP1.6 | length 369.1
  Top Layer w10: TTP1.6@3238.17,3136.51 ccw(c3229.91,3144.78) 3241.6,3144.78 ccw(c3253.29,3144.78) TTP1.6@3245.02,3136.51 ; TTP1.6 3241.6,3167 ; 3241.6,3164.38 cw(c3277.83,3164.38) R3.2@3265.05,3198.29 ; 3241.6,3178.84 cw(c3272.38,3178.84) R3.2@3261.53,3207.64 ; R3.2@3241.6,3193.29 cw(c3266.94,3193.29) R3.2@3258,3217 ; R3.2@3264,3216 3241.6,3193.6 3241.6,3167 ; TTP1.4@3312.98,3136.51 ccw(c3304.71,3144.78) 3316.4,3144.78 ccw(c3328.09,3144.78) TTP1.4@3319.83,3136.51 ; TTP1.4 3316.4,3167 3241.6,3167
NetR4_2: R4.2 TTP2.4 TTP2.6 | length 398.1
  Top Layer w10: TTP2.6@3238.17,2666.51 ccw(c3229.91,2674.78) 3241.6,2674.78 ccw(c3253.29,2674.78) TTP2.6@3245.02,2666.51 ; TTP2.6 3241.6,2702 ; 3241.6,2699.97 cw(c3301.52,2699.97) R4.2@3268.89,2750.23 ; 3241.6,2718.38 cw(c3289.57,2718.38) R4.2@3263.45,2758.61 ; 3241.6,2736.8 cw(c3277.61,2736.8) R4.2@3258,2767 ; R4.2@3241.6,2745.6 3241.6,2702 ; TTP2.4@3312.98,2666.51 ccw(c3304.71,2674.78) 3316.4,2674.78 ccw(c3328.09,2674.78) TTP2.4@3319.83,2666.51 ; TTP2.4 3316.4,2703.6 3243.2,2703.6 3241.6,2702
NetR9_1: R9.1 U4.13 | length 526.9
  Top Layer w10: U4.13@4219.18,3019.04 ccw(c4207.56,3030.67) 4224,3030.67 ccw(c4240.44,3030.67) U4.13@4228.82,3019.04 ; U4.13 4224,3036 cw(c4245,3036) 4245,3057 4458,3057 ccw(c4458,3078) 4479,3078 R9.1 ; R9.1@4464.86,3151.86 cw(c4430.72,3117.72) 4479,3117.72 cw(c4527.28,3117.72) R9.1@4493.14,3151.86
NetR11_1: 
NetR12_1: 
NetR13_1: 
PA0: TTP2.1 U2.6 | length 655.6
  Top Layer w10: TTP2.1@3238.17,2572.02 ccw(c3229.91,2580.29) 3241.6,2580.29 ccw(c3253.29,2580.29) TTP2.1@3245.02,2572.02 ; TTP2.1 3241.6,2585.6 cw(c3253,2585.6) 3253,2597 v1(3373,2597) ; v1@3369.58,2593.58 ccw(c3361.31,2585.31) 3361.31,2597 ccw(c3361.31,2608.69) v1@3369.58,2600.42 ; v1@3662.37,2620.42 ccw(c3654.1,2628.69) 3665.8,2628.69 ccw(c3677.49,2628.69) v1@3669.22,2620.42 ; v1(3665.8,2617) U2.6
  Bottom Layer w10: v1(3373,2597) 3648,2597 ccw(c3648,2614.8) 3665.8,2614.8 v1(3665.8,2617) ; v1@3376.42,2593.58 cw(c3384.69,2585.31) 3384.69,2597 cw(c3384.69,2608.69) v1@3376.42,2600.42 ; v1@3662.1,2613.87 cw(c3656.17,2608.86) 3663.67,2606.85 ; 3663.68,2606.89 cw(c3673.09,2604.37) v1@3668.22,2612.81
PA1: TTP1.1 U2.7 | length 1036.5
  Top Layer w10: TTP1.1@3238.17,3042.02 ccw(c3229.91,3050.29) 3241.6,3050.29 ccw(c3253.29,3050.29) TTP1.1@3245.02,3042.02 ; TTP1.1 3241.6,3060.6 3243,3062 v1(3413,3062) ; v1@3409.58,3058.58 ccw(c3401.31,3050.31) 3401.31,3062 ccw(c3401.31,3073.69) v1@3409.58,3065.42 ; v1@3687.96,2645.42 ccw(c3679.69,2653.69) 3691.39,2653.69 ccw(c3703.08,2653.69) v1@3694.81,2645.42 ; v1(3691.39,2642) U2.7
  Bottom Layer w10: v1(3413,3062) 3454,3062 cw(c3454,3038) 3478,3038 3478,2687 ccw(c3523,2687) 3523,2642 v1(3691.39,2642) ; v1@3416.42,3058.58 cw(c3424.69,3050.31) 3424.69,3062 cw(c3424.69,3073.69) v1@3416.42,3065.42 ; v1@3687.96,2638.58 ccw(c3679.69,2630.31) 3679.69,2642 ccw(c3679.69,2653.69) v1@3687.96,2645.42
RGB_CTRL: P3.1 R13.1 U2.13 | length 1377.2
  Top Layer w10: R13.1@3538.47,3159.39 ccw(c3512,3137.9) 3512,3172 ; R13.1@3538.47,3184.61 cw(c3512,3206.1) 3512,3172 ; R13.1@3568.14,3157.86 cw(c3602.28,3123.72) 3602.28,3172 cw(c3602.28,3220.28) R13.1@3568.14,3186.14 ; v1@3714.58,3129.42 ccw(c3706.31,3137.69) 3718,3137.69 ccw(c3729.69,3137.69) v1@3721.42,3129.42 ; U2.13 3716.98,3046 v1(3718,3046) ; 3716.98,3031.84 cw(c3732.16,3031.84) v1@3721.42,3042.58 ; v1(3718,3126) 3718,3146 ccw(c3692,3146) 3692,3172 R13.1 3512,3172 ; P3.1@3721.66,3549.66 ccw(c3679.79,3507.79) 3679.79,3567 ccw(c3679.79,3626.21) P3.1@3721.66,3584.34 ; P3.1@3728.73,3556.73 ccw(c3703.93,3531.93) 3703.93,3567 ccw(c3703.93,3602.07) P3.1@3728.73,3577.27 ; P3.1 3558,3567 ccw(c3558,3497) 3488,3497 3488,3196 ccw(c3512,3196) 3512,3172
  Bottom Layer w10: v1@3714.58,3049.42 ccw(c3706.31,3057.69) 3718,3057.69 ccw(c3729.69,3057.69) v1@3721.42,3049.42 ; v1@3714.58,3122.58 cw(c3706.31,3114.31) 3718,3114.31 cw(c3729.69,3114.31) v1@3721.42,3122.58 ; v1(3718,3046) v1(3718,3126)
SWCLK: U2.20
SWDIO: U2.19
UD+: U1.5 U1.7 U4.5 | length 1917.6
  Top Layer w10: U4.5@4269.18,2662.96 cw(c4259.97,2653.74) 4273,2653.74 ; 4273,2648.91 cw(c4292.86,2648.91) U4.5@4278.82,2662.96 ; U4.5@4273,2699.27 4273,2637 ccw(c4293,2637) v1@4293,2617 ; 4285.17,2619.1 ccw(c4288.24,2630.56) v1@4295.17,2620.93 ; v1(4348,2617) 4498,2617 cw(c4498,2567) 4548,2567 4548,2442 ccw(c4598,2442) 4598,2392 4934.3,2392 ccw(c4934.3,2430.7) 4973,2430.7 v1(4973,2617) ; v1@4351.42,2613.58 cw(c4359.69,2605.31) 4359.69,2617 cw(c4359.69,2628.69) v1@4351.42,2620.42 ; v1@4969.58,2613.58 cw(c4961.31,2605.31) 4973,2605.31 cw(c4984.69,2605.31) v1@4976.42,2613.58 ; v1@4969.58,2780.42 ccw(c4961.31,2788.69) 4973,2788.69 ccw(c4984.69,2788.69) v1@4976.42,2780.42 ; v1(4973,2777) 4973,2830.16 ; U1.7@5147.26,2830.16 4973,2830.16 ; U1.5@5147.26,2869.53 4990.53,2869.53 ccw(c4990.53,2852) 4973,2852 4973,2830.16
  Bottom Layer w10: v1(4298,2617) v1(4348,2617) ; v1@4301.42,2613.58 cw(c4309.69,2605.31) 4309.69,2617 cw(c4309.69,2628.69) v1@4301.42,2620.42 ; v1@4344.58,2613.58 ccw(c4336.31,2605.31) 4336.31,2617 ccw(c4336.31,2628.69) v1@4344.58,2620.42 ; v1@4969.58,2620.42 ccw(c4961.31,2628.69) 4973,2628.69 ccw(c4984.69,2628.69) v1@4976.42,2620.42 ; v1@4969.58,2773.58 cw(c4961.31,2765.31) 4973,2765.31 cw(c4984.69,2765.31) v1@4976.42,2773.58 ; v1(4973,2617) v1(4973,2777)
UD-: U1.6 U1.8 U4.6 | length 1738.2
  Top Layer w10: U4.6@4319.18,2662.96 cw(c4307.56,2651.33) 4324,2651.33 cw(c4340.44,2651.33) U4.6@4328.82,2662.96 ; U4.6 4324,2616 ccw(c4348,2616) 4348,2592 4473,2592 cw(c4473,2542) 4523,2542 4523,2417 ccw(c4573,2417) 4573,2367 4959.51,2367 ccw(c4959.51,2415.49) 5008,2415.49 v1(5008,2617) ; v1@5004.58,2613.58 cw(c4996.31,2605.31) 5008,2605.31 cw(c5019.69,2605.31) v1@5011.42,2613.58 ; v1@5004.58,2780.42 ccw(c4996.31,2788.69) 5008,2788.69 ccw(c5019.69,2788.69) v1@5011.42,2780.42 ; v1(5008,2777) 5008,2791.09 cw(c5027.39,2791.09) 5027.39,2810.47 U1.8 5184,2810.47 5184,2849.84 U1.6@5147.26,2849.84
  Bottom Layer w10: v1@5004.58,2620.42 ccw(c4996.31,2628.69) 5008,2628.69 ccw(c5019.69,2628.69) v1@5011.42,2620.42 ; v1@5004.58,2773.58 cw(c4996.31,2765.31) 5008,2765.31 cw(c5019.69,2765.31) v1@5011.42,2773.58 ; v1@5007,2618 5007,2614 5008,2613 v1(5008,2617) v1(5008,2777)
VCC: C3.2 C6.2 C7.2 C9.2 D1.1 D2.1 D3.1 D4.1 Q2.E R2.2 R10.1 TTP1.5 TTP2.5 U2.5 U2.16 U3.2 U4.4 U4.16 | length 7603.9
  Top Layer w10: C3.2@3135.31,2585.46 ccw(c3130.5,2597) 3143,2597 ; C7.2@3138,3187 cw(c3138,3126.64) 3180.68,3169.32 ; C7.2@3138,3197 cw(c3138,3160.79) 3163.61,3186.39 ; C7.2 3198,3152 3198,3112 3228,3082 v1(3268,3082) 3279,3093 TTP1.5 ; C3.2@3143,2574.5 3143,2597 ; C3.2@3150.69,2585.46 cw(c3155.5,2597) 3143,2597 ; C7.2@3158,3207 ccw(c3194.21,3207) 3168.61,3181.39 ; v1@3264.58,2613.58 ccw(c3256.31,2605.31) 3256.31,2617 ccw(c3256.31,2628.69) v1@3264.58,2620.42 ; v1@3264.58,3078.58 ccw(c3256.31,3070.31) 3256.31,3082 ccw(c3256.31,3093.69) v1@3264.58,3085.42 ; v1@3268,3086.84 ccw(c3268,3098.53) 3276.27,3090.27 ccw(c3284.53,3082) v1@3272.84,3082 ; TTP2.5@3275.58,2639.98 cw(c3267.31,2631.71) 3279,2631.71 cw(c3290.69,2631.71) TTP2.5@3282.42,2639.98 ; TTP1.5@3275.58,3109.98 cw(c3267.31,3101.71) 3279,3101.71 cw(c3290.69,3101.71) TTP1.5@3282.42,3109.98 ; TTP2.5 3279,2628 cw(c3268,2628) v1(3268,2617) 3163,2617 ccw(c3163,2597) 3143,2597 ; U2.5 3640.2,2586 ccw(c3674.2,2586) 3674.2,2552 3822,2552 cw(c3822,2526) 3848,2526 3848,2406 cw(c3838,2406) 3838,2396 ; Q2.E@3782.31,3196.81 cw(c3760.12,3174.62) 3791.5,3174.62 cw(c3822.88,3174.62) Q2.E@3800.69,3196.81 ; Q2.E 3791.5,3167 ccw(c3821.5,3167) 3821.5,3137 4002,3137 4036,3171 C9.2 ; R2.2 3838,2396 ; R2.2@3821.48,2386.28 cw(c3838,2377.1) 3838,2396 ; R2.2@3821.48,2405.72 ccw(c3838,2414.9) 3838,2396 ; v1(4073,2893) U4.16@4073,2982.73 ; U4.16 4074,3065 4104,3095 C9.2 ; R10.1 C9.2 ; U3.2@4615.06,2833.06 4631.06,2833.06 U3.2
  Top Layer w19.68: 2700.59,2518.41 cw(c2666.18,2484) D2.1@2714.84,2484 ; 2700.59,3149.59 ccw(c2666.18,3184) D1.1@2714.84,3184 ; 2817.68,3461.68 ccw(c3017.29,3262.07) 2735,3262.07 D1.1 2684.29,3133.29 ccw(c2755,3062.58) 2655,3062.58 2655,2834 ; D3.1 2818.89,2200.11 cw(c3021.42,2402.64) 2735,2402.64 D2.1 2684.29,2534.71 cw(c2755,2605.42) 2655,2605.42 2655,2834 ; v1(3438,2692) v1(3438,2792) ; v1(3640,2792) v1(3438,2792) ; U2.5 U2.16 ; U4.4 v1(4224,2792) 4574,2792 U3.2@4615.06,2833.06 ; 4597.32,2815.32 cw(c4623.96,2788.68) U3.2@4623.96,2826.35 ; U3.2 4697,2836 4729,2868 C6.2 ; U3.2@4650.86,2829.18 cw(c4667.33,2812.71) 4667.33,2836 cw(c4667.33,2859.29) U3.2@4650.86,2842.82 ; C6.2@4718.28,3075.28 cw(c4692.41,3049.41) 4729,3049.41 cw(c4765.59,3049.41) C6.2@4739.72,3075.28 ; 2655,2834 3405,2834 cw(c3405,2801) 3438,2801 v1(3438,2792)
  Top Layer w20.47: 2817.68,3461.68 D4.1
  Bottom Layer w10: v1(3268,2617) 3413,2617 ccw(c3413,2642) 3438,2642 v1(3438,2692) ; v1(3268,3082) 3353,3082 ; v1@3271.42,2613.58 cw(c3279.69,2605.31) 3279.69,2617 cw(c3279.69,2628.69) v1@3271.42,2620.42 ; v1@3271.42,3078.58 cw(c3279.69,3070.31) 3279.69,3082 cw(c3279.69,3093.69) v1@3271.42,3085.42 ; v1@3434.58,2688.58 cw(c3426.31,2680.31) 3438,2680.31 cw(c3449.69,2680.31) v1@3441.42,2688.58
  Bottom Layer w15.75: 3353,3082 3438,2997
  Bottom Layer w19.68: v1(3438,2792) 3438,2997 ; v1(3640,2792) 4073,2792 ; v1(4073,2893) 4073,2792 ; v1(4224,2792) 4073,2792
pads on no net: U1. U1.0 U1.1@5175.61,2726.22 U1.3 U1.4 U1.9 U1.10 U2.2 U2.3 U2.11 U2.14 U3.4 U4.7 U4.8 U4.9 U4.10 U4.11 U4.12

## Polygon pours and split planes (outlines as drawn)
GND on Top Layer "Top Layer-No Net" (solid, remove dead copper, pour order 2): 2130,4339 ccw(c2130,4279) 2070,4279 2070,1214 cw(c2130,1214) 2130,1274 6195,1274 cw(c6195,1334) 6135,1334 6135,4539
GND on Bottom Layer "Top Layer-No Net" (solid, remove dead copper, pour order 4): 5970,4414 5970,4479 ccw(c5870,4479) 5870,4579 2255,4579 cw(c2255,4539) 2295,4539 2295,1264 ccw(c2355,1264) 2355,1204 6600,1204

## Keep-outs
Keep-Out Layer:
  circle w5: c4479.46,2209.35 r59.06
  circle w5: c3298.35,2209.35 r59.06
  circle w5: c3298.35,3469.19 r59.06
  circle w5: c4479.46,3469.19 r59.06
  lines w5: 5424,2643 5424,3036 ; 5424.34,2642.42 5070.01,2642.42 5070.01,2298.02 cw(c3888.91,2839.27) 4085.19,1554.97 ccw(c3888.91,1540.06) 3692.62,1554.97 cw(c3888.91,2839.27) 3692.62,4123.57 ccw(c3888.91,4138.48) 4085.19,4123.57 cw(c3888.91,2839.27) 5070.01,3380.52 5070.01,3036.12 5424.34,3036.12

## Other copper
Top Layer:
  pour cut-out: 5098,2949 5098,2959 4915,2959 4909,2953 4909,2949
  pour cut-out: 5098,2721 4963,2721 4963,2729 5098,2729
  pour cut-out: 4359.69,2617 4359.69,2592.31 4493,2592 4523,2562 4523,2402 4558,2367 4936,2367 4981,2375 4965,2392 4965,2395 4965,2402 4936,2390.3 4934.3,2392 4581,2392 4548,2425 4548,2586 4517,2617
  pour cut-out: 3619,2669 3635,2669 3635,2571 3643.25,2562.75 3643.25,2555.04 3618.04,2555.04 3618,2555 3618,2668

## Silkscreen, mask and mechanical layers (free items; w line width, h text height)
Top Overlay:
  lines w8: 3805,3633 3805,3708 4090,3708 ; 4090,3708 4090,3783 3690,3783 3690,3708 3690,3633 4090,3633 4090,3708 ; 3688,1977 3688,2047 4088,2047 4088,1977 3688,1977
  text "RGB-CTRL" at 3710,3728 h40
  text "VCC-5V" at 3835,3648 h40
  text "GND" at 3828,1992 h40
Bottom Overlay:
  drawing of 2869 lines, arcs and shapes, not listed
  text "Night Light V1.2.1" at 4966,3005 h60
  text "2019-03-18" at 4906,2904 h60